# Altium PCB PCB.PcbDoc
Units mm, origin at the board's own origin, x right, y up, seen from the top; angles counter-clockwise.
Board outline 48.64 x 37.97 mm, 2 copper layers (Top Layer, Bottom Layer); 66 components, 33 nets, 189 pads, 161 vias.
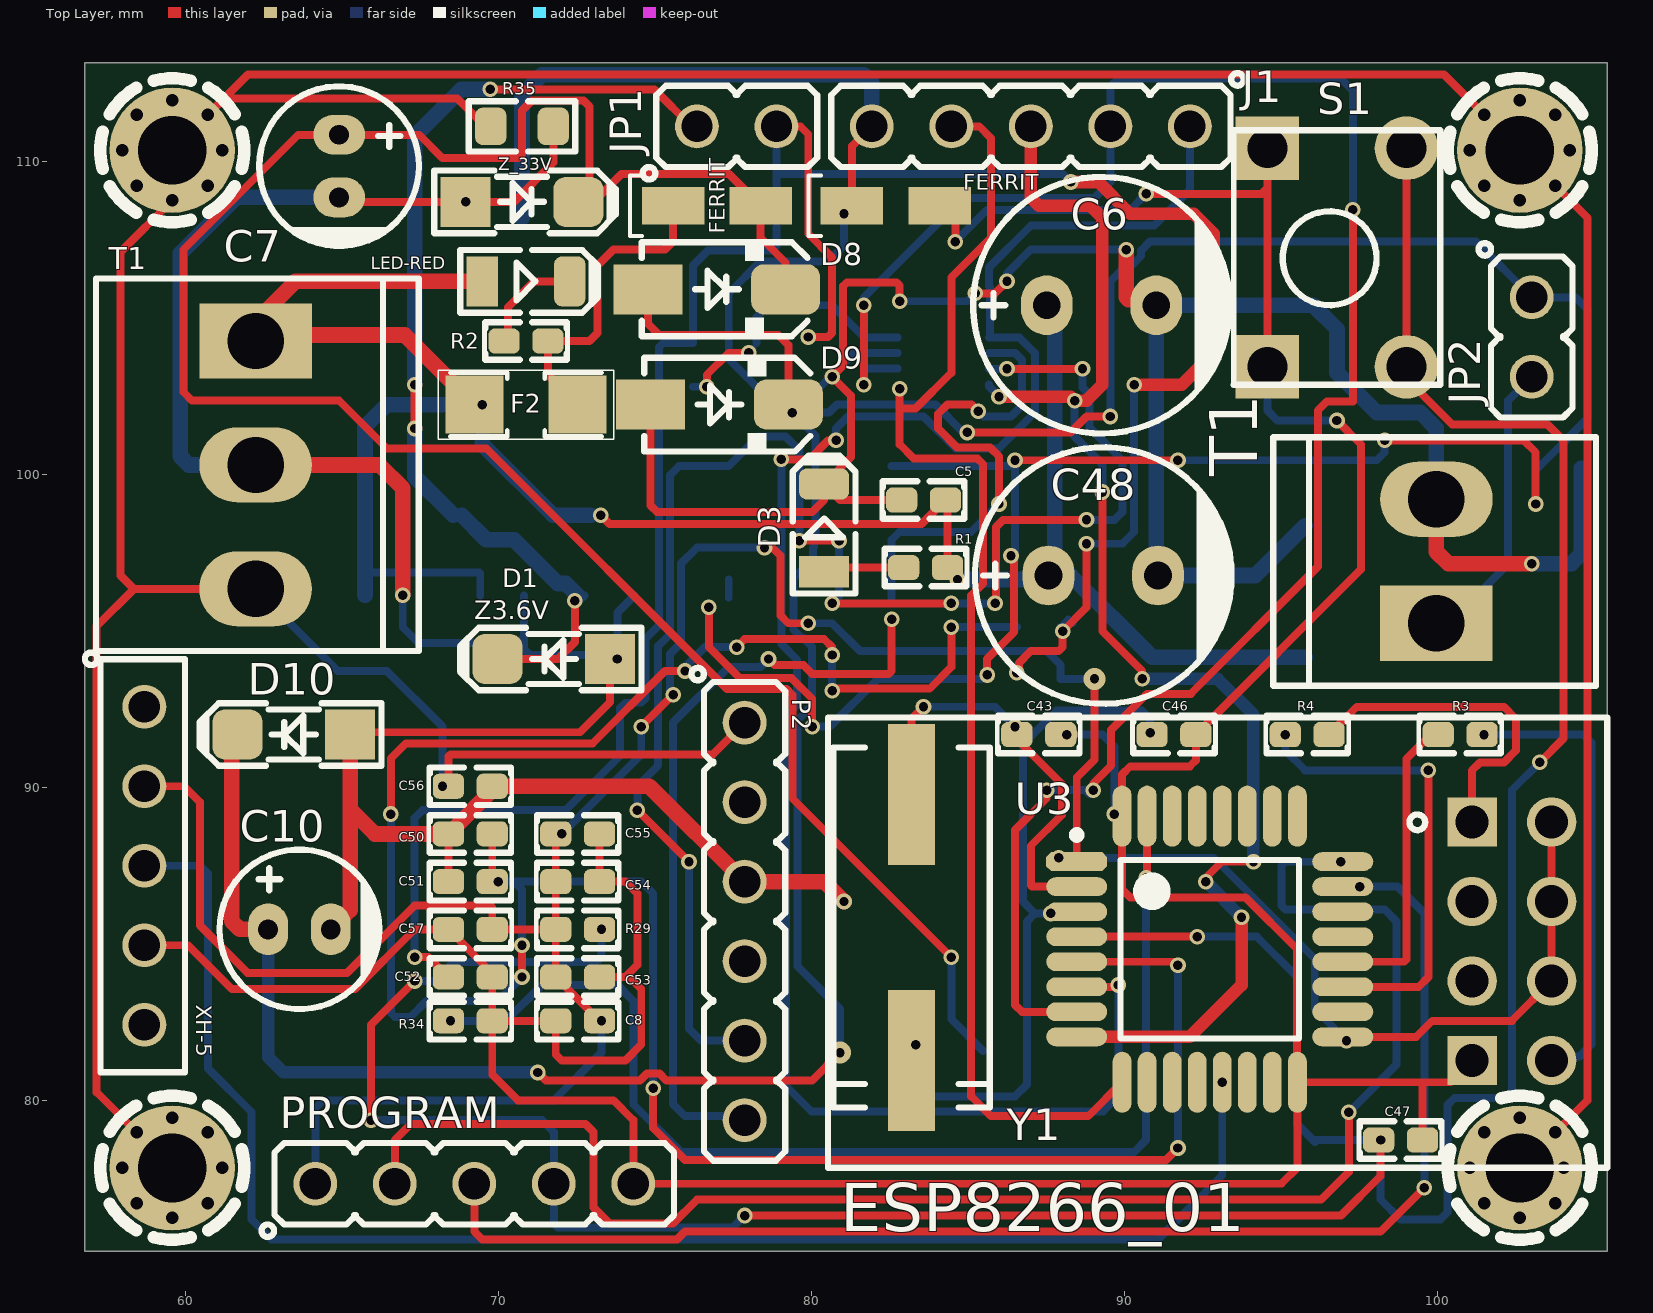
[diagram p0: Top Layer view]
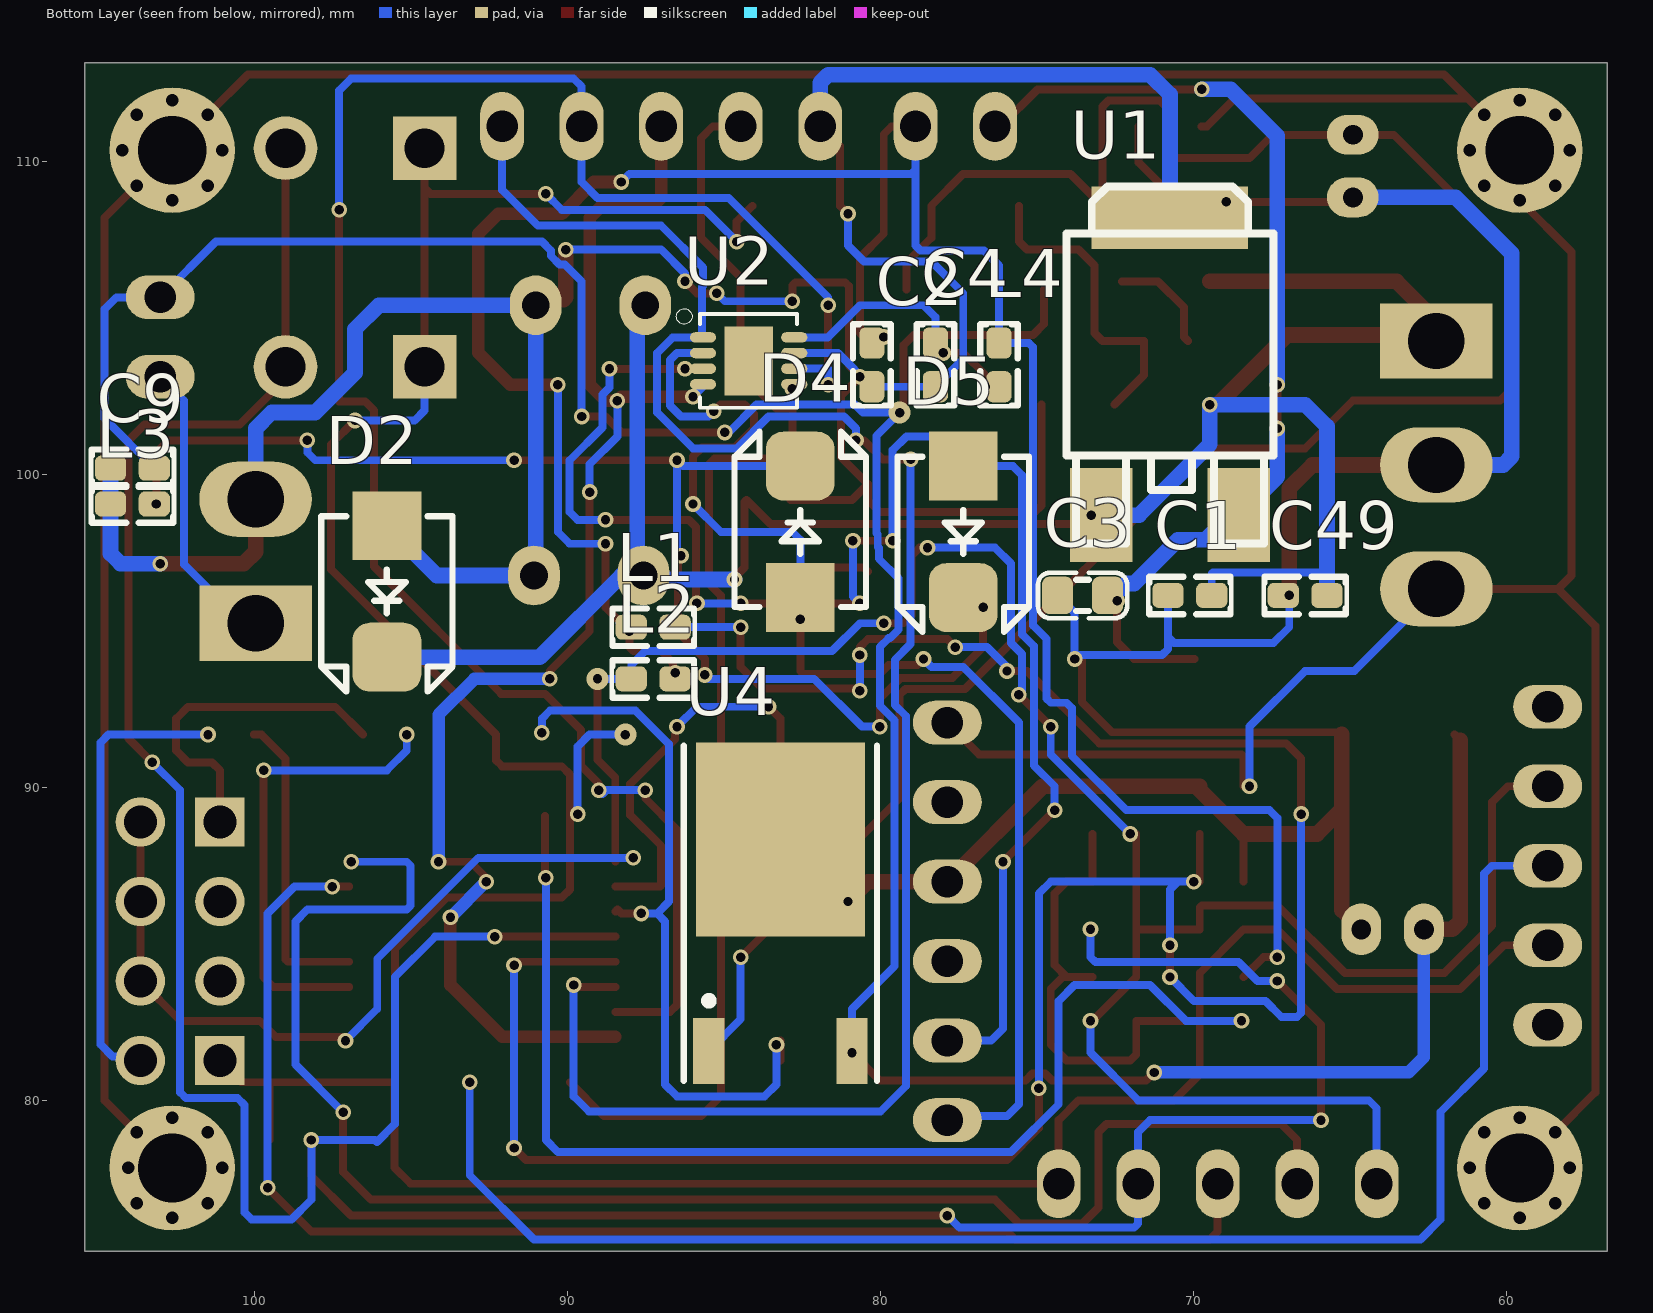
[diagram p1: Bottom Layer view, seen from below]

## Layer stack, top to bottom
Top Solder: solder mask 0.0102, Solder Resist, Dk 3.5
Top Layer: signal copper 0.0356
Dielectric 1: dielectric 0.32, FR-4, Dk 4.8
Bottom Layer: signal copper 0.0356
Bottom Solder: solder mask 0.0102, Solder Resist, Dk 3.5

## Board outline
56.769,75.184 56.769,113.157 105.41,113.157 105.41,75.184

## Design rules (kind name [scope] priority, off if disabled: settings)
Clearance [All] p1: gap=0.1 ignorepadtopadclearanceinfootprint=FALSE
PolygonConnect [All] p1: connectstyle=Relief reliefconductorwidth=0.254 reliefentries=4 polygonreliefangle="90 Angle" airgapwidth=0.254
RoutingVias [All] p1: holewidth=0.3 width=0.5 viastyle="Through Hole" minholewidth=0.1 minwidth=0.3 maxholewidth=4 maxwidth=1.27
SolderMaskExpansion [All] p1: expansion=0.102
Width [All] p1: maxlimit=4 minlimit=0.1 preferedwidth=0.3
30 further rules are at their usual default settings.

## Components (designator, comment, footprint, x,y, rotation, side; value= is the part's Value field where it differs from the comment)
C1 "100nF" C0603 70.104,96.139 r0 bottom
C2 "350nF" C0603 80.264,103.505 r90 bottom
C3 "10uF" C0603E 73.533,96.139 r0 bottom
C4 "350nF" C0603 78.232,103.505 r90 bottom
C5 "350nF" C0603 83.566,99.187 r0 top
C6 "470uF35V" "cap 03" 89.253,105.41 r180 top value=100uF50V
C7 "0.33uF/50V" "cap 01" 64.897,109.855 r90 top value=100uF50V
C8 "100nF" C0603 72.517,82.55 r0 top
C9 "0.1uF" C0603 103.886,100.203 r180 bottom
C10 "1uF/50V" "cap 01" 63.627,85.471 r180 top value=100uF50V
C43 "xpF" C0603 87.249,91.694 r0 top
C46 "xpF" C0603 91.567,91.694 r0 top
C47 "100nF" C0603 98.806,78.74 r0 top
C48 "220uf/35V" "cap 03" 89.309,96.774 r180 top value=100uF-35V
C49 "100nF" C0603 66.421,96.139 r180 bottom
C50 "10nF" L0603 69.088,88.519 r0 top value=100nF
C51 "1uF" C0603 69.088,86.995 r180 top
C52 "10uF" L0603 69.088,83.947 r0 top
C53 "100nF" C0603 72.517,83.947 r180 top
C54 "4.7uF" C0603 72.517,86.995 r180 top value=100nF
C55 "100nF" C0603 72.517,88.519 r180 top
C56 "100nF-400V" C0603 69.088,90.043 r180 top
C57 "4.7uF" C0603 69.088,85.471 r0 top value=100nF
D1 "Z3.6V" D_SOD80 71.755,94.107 r180 top
D2 "SS34" D_SMB 95.758,96.266 r270 bottom
D3 "LED_SMD_RED" LED1206RED 80.391,98.298 r90 top
D4 "SS34" D_SMB 82.55,98.171 r90 bottom
D5 "V3PAL45" D_SMB 77.343,98.171 r270 bottom
D8 "1N4001" D_SMA 76.962,105.918 r0 top
D9 "1N4001" D_SMA 77.048,102.235 r0 top
D10 "Z5.6V" D_SOD80 63.446,91.694 r180 top
ESP8266_01 "STM32F042K6T6" My_32A_M 92.71,84.836 r0 top locked (schematic designator U5)
F2 "Fuse 1" "1206 FUSE" 73.753,101.33 r0 top
FERRIT "Ferrite" "CAPP 1206 (3216X18L) Size A" 75.565,108.585 r0 top (schematic designator F3)
FERRIT "Ferrite" "CAPP 1206 (3216X18L) Size A" 81.28,108.585 r0 top (schematic designator F1)
J1 "out bmd101" HDR_M_1X5 86.995,111.125 r180 top
JP1 "Jumper" HDR_M_1X2 77.597,111.125 r0 top
JP2 "Jumper" HDR_M_1X2 102.997,104.394 r270 top
L1 "10uH" L0603 87.249,95.123 r0 bottom
L2 "10uH" L0603 87.249,93.472 r0 bottom
L3 "10uH" L0603 103.886,99.06 r180 bottom
L4 "10uH" L0603 76.2,103.505 r270 bottom
LED-RED "LED-RED" LED1206RED 70.866,106.172 r0 top (schematic designator D6)
M1 "DNP/MH" SCMH_M2 102.616,110.363 r0 top
M2 "DNP/MH" SCMH_M2 59.563,110.363 r0 top
M3 "DNP/MH" SCMH_M2 59.563,77.851 r0 top
M4 "DNP/MH" SCMH_M2 102.616,77.851 r0 top
P2 "Header 6" HDR_M_1X6 77.851,85.725 r270 top
PROGRAM "program" HDR_M_1X5 69.215,77.343 r0 top (schematic designator P3)
R1 "1K" R0603 83.631,97.028 r0 top
R2 "4.7k" R0603 70.866,104.267 r180 top
R3 "100" R0603 100.711,91.694 r0 top
R4 "100" R0603 95.823,91.694 r0 top
R29 "10k" R0603 72.517,85.471 r0 top value=4.7R
R34 "10k" R0603 69.088,82.55 r0 top value=4.7R
R35 "1M" R0805 70.739,111.125 r180 top
S1 "Tactile Switch 6*6" "Switch - Push to On" 96.774,106.934 r90 top
T1 "PHOENIX" PWL_2 99.949,97.23 r90 top
T1 "Phoenix-RA-3PIN" PWL_3 62.23,100.307 r270 top (schematic designator P1)
U1 "LF33CDT-TR" LF33_2 70.739,103.454 r180 bottom
U2 "BMD101" SON50P305X300X55-9T180X220N 84.201,103.632 r180 bottom
U3 "ESP8266-01" ESP8266-01 170.053,122.174 r180 top locked
U4 "L7805ACD2T" TO-252 83.185,84.963 r180 bottom
XH-5 "XH_5" HDR_F_1X5 58.674,87.503 r270 top (schematic designator J2)
Y1 "x MHz" "Crystal SMD" 83.185,84.963 r90 top
Z_33V "Z33V" D_SOD80 70.739,108.712 r0 top (schematic designator D7)

## Footprints (in the part's own frame and the unit in brackets; to place one, negate y for a bottom-side part, rotate by r counter-clockwise, add the part's x,y. Pads: shape width x height; smd on the part's side, far side on the other; paste and mask are expansions set on the pad)
"1206 FUSE" [mm]
  rect 1.85x1.85 smd: 1(-4.538,0.905) 2(-1.238,0.905)
  silkscreen extent -5.69,-0.2 -0.09,2, body extent -4.49,0.1 -1.29,1.71, height 1
C0603 [mm] "CHIP Capacitor, 1.6X0.8mm, 0603"
  rrect50% 1x0.8 smd mask+0.075: 1(-0.7,0) 2(0.7,0)
  silkscreen extent -1.33,-0.6 1.32,0.6, body extent -0.8,-0.4 0.8,0.4, height 0.9
C0603E [mm] "CHIP Capacitor, 1.6X0.8mm, EXPANDED PAD"
  rrect50% 1x1.2 smd mask+0.05: 1(-0.8,0) 2(0.8,0)
  silkscreen extent -1.43,-0.72 1.43,0.72, body extent -0.8,-0.4 0.8,0.4, height 0.9
"cap 01" [mm]
  oval 1.27x1.651 hole 0.635: 1(1,0) 2(-1,0)
  silkscreen extent -2.55,-2.55 2.55,2.55, body extent -2.53,-2.53 2.53,2.53, height 12.54
"cap 03" [mil]
  oval 65x75 hole 35: 1(68.9,0) 2(-68.9,0)
  silkscreen extent -161,-161 161,161, body extent -159,-159 157,158, height 473
"CAPP 1206 (3216X18L) Size A" [mm] "Chip Capacitor, 2-Leads, Body 3.2x1.6mm, IPC High Density, chip Tantalum"
  rect 1.999x1.199 smd: 1(0,0) 2(2.8,0)
  silkscreen extent -1.38,-0.97 -0.99,0.97, body extent -0.43,-0.9 3.21,0.9, height 1.8
"Crystal SMD" [mm]
  rect 4.5x1.5 smd: 1(-3.683,0) 2(4.817,0)
  silkscreen extent -5.18,-2.5 6.32,2.5, body extent -5.64,-2.25 6.66,2.25, height 5.18
D_SMA [mm] "SMA Molded Diode, 2-Leads, Body 4.3x2.7mm, SOD-128"
  rect 2.2x1.6 smd: 1(-2.2,0)
  rrect50% 2.2x1.6 smd: 2(2.2,0)
  silkscreen extent -2.4,-1.5 2.9,1.5, body extent -2.75,-1.4 2.75,1.4, height 2.6
D_SMB [mm] "SMB Molded Diode, 2-Leads, Body 4.3x3.5mm"
  rect 2.2x2.2 smd: 1(-2.1,0)
  rrect50% 2.2x2.2 smd: 2(2.1,0)
  Top Layer pour cut-out: -1.524,2.1 -1.524,-2.1 1.524,-2.1 1.524,2.1
  silkscreen extent -2.4,-2.1 3.2,2.1, body extent -2.75,-1.95 2.75,1.95, height 2.45
D_SOD80 [mm] "SOD-80 MINI-MELF 3.6X1.6mm, LL-34, LL4148"
  rect 1.6x1.6 smd: 1(-1.8,0)
  rrect50% 1.6x1.6 smd: 2(1.8,0)
  Top Layer pour cut-out: -1.016,1.016 1.016,1.016 1.016,-1.016 -1.016,-1.016
  silkscreen extent -2.8,-1 3,1, body extent -1.85,-0.8 1.85,0.8, height 2
ESP8266-01 [mm]
  rect 1.575x1.575 hole 1.05: 1(68.961,33.274) 4(68.961,40.894)
  round 1.575 hole 1.05: 2(68.961,35.814) 3(68.961,38.354) 5(66.421,40.894) 6(66.421,38.354) 7(66.421,35.814) 8(66.421,33.274)
  silkscreen extent 64.64,29.93 89.53,44.32, body extent 64.59,29.85 89.59,44.35, height 6.3
HDR_F_1X5 [mm] "HEADER FEMALE pitch: 2.54mm"
  round 1.4 / inner round 1.4 / far side oval 1.4x2.2 hole 1 mask+0.1: 1(-5.08,0) 2(-2.54,0) 3(0,0) 4(2.54,0) 5(5.08,0)
  silkscreen extent -6.81,-1.9 6.6,1.3, body extent -6.47,-1.3 6.48,1.2, height 8.5
HDR_M_1X2 [mm] "Connector; Header; 2 Position"
  round 1.4 / inner round 1.4 / far side oval 1.4x2.2 hole 1 mask+0.1: 1(-1.27,0) 2(1.27,0)
  silkscreen extent -3,-1.7 2.57,1.3, body extent -2.54,-1.25 2.44,1.25, height 8.72
HDR_M_1X5 [mm] "Connector; Header; 5 Position"
  round 1.4 / inner round 1.4 / far side oval 1.4x2.2 hole 1 mask+0.1: 1(-5.08,0) 2(-2.54,0) 3(0,0) 4(2.54,0) 5(5.08,0)
  silkscreen extent -6.8,-1.7 6.38,1.3, body extent -6.35,-1.27 6.35,1.27, height 8.54
HDR_M_1X6 [mm] "Connector; Header; 6 Position"
  round 1.4 / inner round 1.4 / far side oval 1.4x2.2 hole 1 mask+0.1: 1(-6.35,0) 2(-3.81,0) 3(-1.27,0) 4(1.27,0) 5(3.81,0) 6(6.35,0)
  silkscreen extent -8.1,-1.7 7.65,1.3, body extent -7.62,-1.3 7.62,1.19, height 8.54
L0603 [mm] "INDUCTOR, FERRITE BEAD, 0603, 1.6X0.8mm"
  rrect50% 1x0.8 smd mask+0.05: 1(-0.7,0) 2(0.7,0)
  silkscreen extent -1.32,-0.6 1.32,0.6, body extent -0.8,-0.4 0.8,0.4, height 0.95
LED1206RED [mm] "LED, 1206, RED"
  rect 1x1.6 smd mask+0.075: 1(-1.4,0)
  rrect50% 1x1.6 smd mask+0.075: 2(1.4,0)
  Top Layer pour cut-out: -1.1,1.1 -1.1,-1.1 1.1,-1.1 1.1,1.1
  silkscreen extent -2.1,-1 2.3,1, body extent -1.6,-0.8 1.6,0.8, height 0.68
LF33_2 [mm]
  rect 2x3 smd: 1(-2.2,-4.75) 3(2.2,-4.75)
  rect 5x2 smd: 2(0,4.75)
  silkscreen extent -3.3,-5.65 3.3,5.75, body extent -3.38,-4.95 3.35,5.15, height 2.37
My_32A_M [mm]
  oct 1.95x0.6 smd: 1(-4.25,2.8)
  oval 1.95x0.6 smd: 2(-4.25,2) 3(-4.25,1.2) 4(-4.25,0.4) 5(-4.25,-0.4) 6(-4.25,-1.2) 7(-4.25,-2) 8(-4.25,-2.8) 17(4.25,-2.8) 18(4.25,-2) 19(4.25,-1.2) 20(4.25,-0.4) 21(4.25,0.4) 22(4.25,1.2) 23(4.25,2) 24(4.25,2.8)
  oval 0.6x1.95 smd: 9(-2.8,-4.25) 10(-2,-4.25) 11(-1.2,-4.25) 12(-0.4,-4.25) 13(0.4,-4.25) 14(1.2,-4.25) 15(2,-4.25) 16(2.8,-4.25) 25(2.8,4.25) 26(2,4.25) 27(1.2,4.25) 28(0.4,4.25) 29(-0.4,4.25) 30(-1.2,4.25) 31(-2,4.25) 32(-2.8,4.25)
  silkscreen extent -4.37,-2.85 2.85,3.77, body extent -3.5,-3.5 3.5,3.5, height 1.2
PWL_2 [mm] "Connector; Header; 2 Position"
  rect 2.4x3.6 hole 1.8: 1(-1.98,0)
  oval 2.4x3.6 hole 1.8: 2(1.98,0)
  silkscreen extent -3.98,-5.1 3.96,5.21, body extent -3.96,-5 3.96,5, height 13.5
PWL_3 [mm] "Terminal Block Green"
  rect 2.4x3.6 hole 1.8: 1(-3.96,0)
  oval 2.4x3.6 hole 1.8: 2(0,0) 3(3.96,0)
  silkscreen extent -5.96,-5.1 5.94,5.21, body extent -5.94,-5 5.94,5, height 13.5
R0603 [mm] "CHIP Resistor 1/10 WATT, 1.6x0.8mm, 0603, 1608"
  rrect50% 1x0.8 smd mask+0.05: 1(-0.7,0) 2(0.7,0)
  silkscreen extent -1.32,-0.6 1.32,0.6, body extent -0.85,-0.4 0.85,0.4, height 0.56
R0805 [mm] "CHIP RESISTOR 1/8 WATT ,2.0X1.3mm, 0805, 2012"
  rrect50% 1x1.2 smd mask+0.05: 1(-1,0) 2(1,0)
  Top Layer pour cut-out: -0.5,0.8 0.5,0.8 0.5,-0.8 -0.5,-0.8
  silkscreen extent -1.7,-0.8 1.7,0.8, body extent -1.15,-0.67 1.15,0.68, height 0.76
SCMH_M2 [mm] "SCREW mouting, M2, 2.0mm diameter and 4.0mm PanHead"
  round 4 / inner round 2.5 / far side round 4 hole 2.2 mask+0.1: 1(0,0)
  Top Layer pour cut-out: 0,2.5 -0.957,2.31 -1.768,1.768 -2.31,0.957 -2.5,0 -2.5,0 -2.31,-0.957 -1.768,-1.768 -0.957,-2.31 0,-2.5 0,-2.5 1.25,-2.165 2.165,-1.25 2.5,0 2.5,0 2.31,0.957 1.768,1.768 0.957,2.31 0,2.5
  Bottom Layer pour cut-out: 0,2.5 -0.957,2.31 -1.768,1.768 -2.31,0.957 -2.5,0 -2.5,0 -2.31,-0.957 -1.768,-1.768 -0.957,-2.31 0,-2.5 0,-2.5 1.25,-2.165 2.165,-1.25 2.5,0 2.5,0 2.31,0.957 1.768,1.768 0.957,2.31 0,2.5
  silkscreen extent -2.3,-2.3 2.3,2.3
SON50P305X300X55-9T180X220N [mm]
  oval 0.835x0.332 smd: 1(-1.458,0.75) 2(-1.458,0.25) 3(-1.458,-0.25) 4(-1.458,-0.75) 5(1.458,-0.75) 6(1.458,-0.25) 7(1.458,0.25) 8(1.458,0.75)
  rect 1.546x2.2 smd: 9(0,0)
  silkscreen extent -2.3,-1.5 1.55,1.67
"Switch - Push to On" [mil]
  rect 80x80 hole 50: 1(-137.5,87.5) 1(137.5,87.5)
  round 80 hole 50: 2(-137.5,-87.5) 2(137.5,-87.5)
  silkscreen extent -160,-130 160,130, body extent -155,-121 157,123, height 205
TO-252 [mm] "D-PAK/TO-252-AA; 3 Leads (1 Cropped); Body 10.1 (inc. leads) x 6.6 mm (LxW max)"
  rect 1x2.1 smd: 1(-2.285,-3.375) 3(2.285,-3.375)
  rect 5.4x6.2 smd: 4(0,3.375)
  silkscreen extent -3.08,-4.32 3.09,6.38, body extent -3.27,-4.11 3.27,5.83, height 2.39

## Part data
C1 C2 C3 C4 C5 C8 C9 C47 C50 C51 C52 C53 C54 C55 C56 C57: library part Cap, "Capacitor", LatestRevisionDate=17-Jul-2002, LatestRevisionNote="Re-released for DXP Platform.", PackageDescription="Radial Cap, Thru-Hole; 2 Leads; 0.3 in Pin Spacing", PackageReference=RAD-0.3, Published=8-Jun-2000, Publisher="Altium Limited"
C6 C7 C10: library part "Cap ELECTROLITIC TOTAL SIZE", "Cap electrolitic radial", Data=16-12-2016, Designer="Abbas Basereh"
C43 C46 C49: library part "CAP SMD PACKAGE", "TOTAL CAPACITOR SMD PACK", Data=2017-3-10, Desc.="CAP SMD TOTAL PACKAGES", Designer="Abbas Basereh"
C48: library part "Cap Pol1", "Polarized Capacitor (Radial)", LatestRevisionDate=17-Jul-2002, LatestRevisionNote="Re-released for DXP Platform.", PackageDescription="Polarized Capacitor (Radial); 2 Leads", PackageReference=RB7.6-15, Published=8-Jun-2000, Publisher="Altium Limited"
D1 D10 Z_33V: library part "D Zener", "Zener Diode", LatestRevisionDate=17-Jul-2002, LatestRevisionNote="Re-released for DXP Platform.", PackageReference=DIODE-0.7, Published=8-Jun-2000, Publisher="Altium Limited"
  D1 D10: PackageDescription="Diode, Thru-Hole; 2 Leads; 0.7 in Pin Spacing"
D2 D4: library part DIODE_SMD_SCHOTTKY_SS34, "DIODE, SCHOTTKY, 20V, 3A", =http://www.chila.ir, ASSEMBLY=ASSEMBLY, DESC=DESCRIPTION, MANF=VISHAY, MANF_P#=SS34, PARAM=20V, PARAM2=3A, Price=PRICE
D3: "LED, SMD, RED"
D5: library part DIODE_SMD_SCHOTTKY_V3PAL45, "DIODE, SCHOTTKY, 45V, 3A", =http://www.chila.ir, ASSEMBLY=ASSEMBLY, DESC=DESCRIPTION, MANF=VISHAY, MANF_P#=V3PAL45HM3_A/I, PARAM="3A, -40~150oC", PARAM2="45Vr, 0.46Vf", Price=0.6$
D8 D9: library part "Diode 1N4148", "High Conductance Fast Diode", Code_JEDEC=DO-204-AH, ComponentLink1Description="Manufacturer Link", ComponentLink1URL=http://www.fairchildsemi.com/, ComponentLink2Description=Datasheet, ComponentLink2URL=http://www.fairchildsemi.com/ds/1N%2F1N4148.pdf, DatasheetVersion=1997, LatestRevisionDate=17-Jul-2002, LatestRevisionNote="Re-released for DXP Platform.", PackageDescription="Diode, Axial; Body 3.8 x 1.9 mm (LxDia. max), Lead Dia. 0.53 mm (max)", PackageReference=DO-35, Published=8-Jun-2000, Publisher="Altium Limited"
ESP8266_01: "ARM® Cortex®-M0 STM32F0 Microcontroller IC 32-Bit Single-Core 48MHz 32KB (32K x 8) FLASH 32-LQFP (7x7)", Package="LQFP-32 STMicroelectronics", Availability="In Stock", Check_prices=https://www.snapeda.com/parts/STM32F042K6T6/STMicroelectronics/view-part/?ref=eda, MF=STMicroelectronics, MP=STM32F042K6T6, Price=None, Purchase-URL=https://pricing.snapeda.com/search/part/STM32F042K6T6/?ref=eda, SnapEDA_Link=https://www.snapeda.com/parts/STM32F042K6T6/STMicroelectronics/view-part/?ref=snap
F2: library part "Fuse 2", "Fuse", LatestRevisionDate=17-Jul-2002, LatestRevisionNote="Re-released for DXP Platform.", PackageReference=PIN-W2/E2.8, Published=8-Jun-2000, Publisher="Altium Limited"
FERRIT FERRIT: library part "Fuse 1", "Fuse", LatestRevisionDate=17-Jul-2002, LatestRevisionNote="Re-released for DXP Platform.", PackageReference=PIN-W2/E2.8, Published=8-Jun-2000, Publisher="Altium Limited"
  FERRIT: PackageDescription="Thru-Hole; 2 Leads"
J1: library part XH_5, "JST-XH pitch: 2.5mm", =http://www.chila.ir, MANF=JST, MANF_P#=JST-B5B-XHA
L1 L2 L3 L4: library part Inductor, "Inductor", Code_IEC=1005, Code_JEITA=0402, LatestRevisionDate=29-May-2009, LatestRevisionNote="IPC-7351 Footprint Added.", PackageDescription="Chip Inductor", PackageReference=0402-A, Published=8-Jun-2000, Publisher="Altium Limited"
LED-RED: library part LED0, "Typical INFRARED GaAs LED", LatestRevisionDate=08-Jul-2005, LatestRevisionNote="Mech Layer 1 removed.", PackageReference=LED-0, Published=8-Jun-2000, Publisher="Altium Limited"
M1 M2 M3 M4: library part SCMH_M3FT, "SCREW mouting, M3, 3.0mm diameter and 6.0mm, FlatHead", =http://www.chila.ir, ASSEMBLY=DNP
P2: "Header, 6-Pin", LatestRevisionDate=17-Jul-2002, LatestRevisionNote="Re-released for DXP Platform.", Publisher="Altium Limited"
PROGRAM: library part "Header 5", "Header, 5-Pin", LatestRevisionDate=17-Jul-2002, LatestRevisionNote="Re-released for DXP Platform.", Publisher="Altium Limited"
R1 R2 R3 R4: library part "RES 0805 0.125W", "RES 0805", Data=16-12-2016, Desc.="RES SMD 0805", Designer="Abbas Basereh"
R29 R34 R35: library part Res1, "Resistor", LatestRevisionDate=17-Jul-2002, LatestRevisionNote="Re-released for DXP Platform.", PackageReference=AXIAL-0.3, Published=8-Jun-2000, Publisher="Altium Limited"
  R29 R34: PackageDescription="Axial Device, Thru-Hole; 2 Leads; 0.3 in Pin Spacing"
S1: library part SW-PB, "Switch", LatestRevisionDate=17-Jul-2002, LatestRevisionNote="Re-released for DXP Platform.", PackageDescription="Switch; 2 Leads", PackageReference=SPST-2, Published=24-Mar-1999, Publisher="Altium Limited"
T1: library part CON_Phoenix_MSTB_02, "2 Pitch: 5.08 mm Color: green Contact surface: Tin Assembly", Manufacturer="PHOENIX CONTACT", Max Current="12 A", Voltage="320 V", Category=Connector, ComponentLink1Description="Header, Nominal current: 12 A Rated voltage (III/2): 320 V Number of positions: 2 Pitch: 5.08 mm Color: green Contact surface: Tin Assembly: Soldering  DESIGNER:ABBAS BASEREH", ComponentLink2Description=Reference, Connector type="PCB Terminal Block", Designer="ABBAS BASEREH", Mounting Technology=Through-Hole, PART.NO=PHOENIX, Pin Count=2, Positions=2, Revision 1=2017-3-1, Status=Unreleased
T1: library part "Header 3", "Phoenix", LatestRevisionDate=17-Jul-2002, LatestRevisionNote="Re-released for DXP Platform.", Publisher="Altium Limited"
U1: "Linear Voltage Regulator IC 1 Output 500mA DPAK", Package="TO-252-3 STMicroelectronics", Availability=Unavailable, MF=STMicroelectronics, MP=LF33CDT-TR, Price=None, SnapEDA_Link=https://www.snapeda.com/parts/LF33CDT-TR/STMicroelectronics/view-part/1049932/?ref=snap
U2: "BMD101 Electrocardiography (ECG/EKG) Sensor mikroBUS™ Click™ Platform Evaluation Expansion Board", Package=None, Availability="Not in stock", Check_prices=https://www.snapeda.com/parts/BMD101/MikroElektronika/view-part/?ref=eda, MF=MikroElektronika, MP=BMD101, Price=None, SnapEDA_Link=https://www.snapeda.com/parts/BMD101/MikroElektronika/view-part/?ref=snap
U3: Package=None, Availability=Unavailable, MF=AI-Thinker, MP=ESP8266-01/ESP-01, Price=None, SnapEDA_Link=https://www.snapeda.com/parts/ESP8266-01/ESP-01/AI-Thinker/view-part/106413/?ref=snap
U4: "Linear Voltage Regulator IC 1 Output 1.5A D2PAK", Package="D2PAK STMicroelectronics", Availability=Unavailable, MF=STMicroelectronics, MP=L7805ACD2T, Price=None, SnapEDA_Link=https://www.snapeda.com/parts/L7805ACD2T/STMicroelectronics/view-part/680973/?ref=snap
XH-5: "JST-XH pitch: 2.5mm", =http://www.chila.ir, MANF=JST, MANF_P#=JST-B5B-XHA
Y1: library part XTAL, "XTAL Crystal", ComponentLink1Description=Datasheet, ComponentLink2Description=Reference, Design Date=2017-1-3, Designer="ABBAS BASEREH", Mounting Technology="Surface Mount\Through-Hole", Status=Unreleased
JP1 JP2: Company=E.P.I.L, Defualt State=Close, Design Date=2011/11/02

## Via types
v1: diameter 0.5, hole 0.3, Top Layer to Bottom Layer, 121 vias
v2: diameter 0.6, hole 0.4, Top Layer to Bottom Layer, 32 vias
v3: diameter 0.7, hole 0.3, Top Layer to Bottom Layer, 8 vias

## Nets (pads, with @x,y where several pads share a name; then routed paths per layer and width w, separated by ;. In a path a pad name is that pad's centre, name@x,y a point inside that pad or via, vN(x,y) a via of type N, cw(c..) or ccw(c..) an arc to the next point about the centre after c; other vN are vias at no path point)
+3.3V: C2.2 C52.1 JP1.2 L1.2 L2.1 L4.1 | length 80.1
  Top Layer w0.254: v1(67.31,84.582) 67.753,84.582 C52.1 ; JP1.2 79.629,111.125 79.883,110.871 79.883,107.696 80.645,106.934 80.645,104.521 80.518,104.394 v1(79.883,104.394) ; v1(86.549,93.664) 86.614,93.729 86.614,93.98 86.995,94.361 87.884,94.361 88.011,94.488 v1(88.011,94.996) 88.773,95.758 v1(88.773,97.79)
  Top Layer w0.4: v1(88.265,109.347) 89.154,109.347 90.17,108.331 92.202,108.331 92.837,107.696 92.837,103.886 91.821,102.87 v1(90.297,102.87)
  Bottom Layer w0.254: v1(67.31,84.582) 67.31,89.027 67.564,89.281 72.136,89.281 73.874,91.019 73.874,92.543 74.041,92.71 74.549,92.71 74.687,92.848 74.687,94.753 75.111,95.177 75.111,97.448 75.115,97.452 75.115,104.071 75.249,104.205 L4.1 76.2,106.68 76.681,107.161 78.713,107.161 78.867,107.315 78.867,109.728 ; JP1.2 78.867,109.728 ; L1.2 88.203,95.377 L1.2@88.33,95.25 ; v1(88.265,109.347) 88.011,109.601 78.994,109.601 78.867,109.728 ; v1(88.773,97.79) 89.916,97.79 90.297,98.171 v1(90.297,102.87)
ADC: ESP8266_01.13 XH-5.3 | length 49.4
  Top Layer w0.254: v1(58.42,87.503) XH-5.3 ; ESP8266_01.13@93.091,80.567 v1(93.11,80.586)
  Bottom Layer w0.254: v1(58.42,87.503) XH-5.3 60.452,87.503 60.706,87.249 60.706,81.026 62.103,79.629 62.103,76.2 62.738,75.565 91.059,75.565 93.11,77.616 v1(93.11,80.586)
AGND: D4.2 D5.2 L3.2 | length 43.3
  Top Layer w0.254: v1(76.708,95.758) 76.708,94.488 77.693,93.503 79.344,93.503 80.01,92.837 v1(80.01,91.948) ; v1(85.598,93.599) 85.598,94.107 86.456,94.965 86.456,97.313 v1(86.36,97.409) ; v1(86.487,100.457) v1(91.694,100.457) ; v1(98.298,101.092) 102.743,101.092 103.124,100.711 v1(103.124,99.06)
  Bottom Layer w0.254: D5.2 D5.2@77.343,96.647 ; v1(80.01,91.948) 80.581,91.948 82.105,93.472 85.471,93.472 v1(85.598,93.599) ; D4.2 86.301,100.271 v1(86.487,100.457) 86.487,97.536 v1(86.36,97.409) ; v1(91.694,100.457) 98.044,100.457 98.298,100.711 v1(98.298,101.092) ; v1(103.124,99.06) L3.2
AVDD_MIC: C50.2 C51.1 ESP8266_01.5 L1.1 | length 81.6
  Top Layer w0.254: v1(66.548,89.154) 66.548,90.932 67.029,91.413 72.998,91.413 75.311,93.726 v1(75.946,93.726) ; C50.2 C51.1 v1(69.977,86.995) ; v1(70.739,83.947) v1(70.739,84.963) ; v1(74.93,80.391) 74.93,79.121 75.946,78.105 91.313,78.105 v1(91.694,78.486) ; v1(77.597,94.488) 77.851,94.742 80.391,94.742 80.645,94.488 v1(80.645,94.234) ; v1(80.645,93.091) 80.714,93.16 83.762,93.16 84.455,93.853 v1(84.455,95.123) ; ESP8266_01.5 91.586,84.436 v1(91.694,84.328)
  Bottom Layer w0.254: v1(66.548,89.154) 66.548,82.804 66.675,82.677 67.183,82.677 67.691,83.185 69.977,83.185 v1(70.739,83.947) ; v1(69.977,86.995) 70.485,86.995 ; v1(70.739,84.963) 70.739,86.741 70.485,86.995 ; v1(74.93,80.391) 74.93,86.614 74.549,86.995 70.485,86.995 ; v1(75.946,93.726) 75.946,93.853 76.581,94.488 v1(77.597,94.488) ; v1(80.645,93.091) v1(80.645,94.234) ; v1(84.455,95.123) L1.1 ; v1(91.694,78.486) v1(91.694,84.328)
BMD-reset: ESP8266_01.7 J1.2 U2.6 | length 62.9
  Top Layer w0.254: v1(81.661,102.87) v1(81.661,105.41) ; v1(87.503,89.916) 87.503,89.662 86.487,88.646 86.487,83.058 86.709,82.836 ESP8266_01.7 ; v1(88.989,89.916) 88.989,90.132 89.556,90.699 89.556,91.842 90.709,92.995 92.106,92.995 96.17,97.059 96.17,102.052 96.449,102.331 97.282,102.331 v1(97.282,108.458)
  Bottom Layer w0.254: v1(81.661,102.87) 81.661,103.378 81.665,103.382 U2.6 ; v1(81.661,105.41) 81.661,105.664 84.836,108.839 89.027,108.839 89.535,109.347 J1.2 89.535,112.395 89.789,112.649 96.901,112.649 97.282,112.268 v1(97.282,108.458) ; v1(87.503,89.916) 88.735,89.916 88.862,89.789 v1(88.989,89.916)
BMD_CS: ESP8266_01.6 J1.1 U2.1 | length 61.7
  Top Layer w0.254: v1(79.025,100.488) 79.914,100.488 80.518,101.092 v1(80.772,101.092) ; ESP8266_01.6 89.732,83.636 v1(89.789,83.693)
  Bottom Layer w0.254: v1@78.929,100.584 v1(79.025,100.488) 79.025,94.584 79.529,94.08 79.529,92.642 79.179,92.292 79.179,80.46 79.983,79.656 89.308,79.656 89.789,80.137 v1(89.789,83.693) ; v1(80.772,101.092) 80.772,101.473 81.153,101.854 83.566,101.854 84.582,100.838 85.979,100.838 87.122,101.981 87.122,103.886 86.626,104.382 U2.1 85.694,104.418 85.694,105.989 85.659,106.024 85.659,106.614 86.995,107.95 90.932,107.95 92.075,109.093 J1.1
BOOT0: ESP8266_01.31 R34.1 | length 37.4
  Top Layer w0.254: v1(90.678,87.122) 90.71,87.154 ESP8266_01.31
  Bottom Layer w0.254: v1(68.453,82.55) 70.231,82.55 71.374,83.693 73.787,83.693 74.295,83.185 74.295,79.883 75.819,78.359 90.297,78.359 90.678,78.74 v1(90.678,87.122)
DGND: C8.1 C43.2 C46.2 C47.2 C52.2 C53.1 C54.1 C55.1 C57.1 ESP8266_01.16 ESP8266_01.32 FERRIT.2@84.08,108.585 PROGRAM.5 R34.2 S1.1 U3.4 XH-5.4 | length 127.2
  Top Layer w0.254: XH-5.4 60.071,84.963 61.468,83.566 65.405,83.566 67.31,85.471 C57.1 69.788,84.071 C52.2 R34.2 ; C53.1 74.041,83.947 ; C55.1 C54.1 74.041,86.995 74.422,86.614 74.422,84.328 74.041,83.947 ; FERRIT.2@84.08,108.585 84.582,108.083 v1(84.582,107.442) ; v1(90.678,108.966) 94.361,108.966 94.551,109.156 ; S1.1@94.551,103.441 94.551,109.156 ; S1.1@94.551,110.426 94.551,109.156 ; v1(96.774,101.727) 97.536,100.965 97.536,96.963 C46.2 92.267,90.87 92.075,90.678 90.17,90.678 89.91,90.418 ESP8266_01.32 89.91,86.747 90.17,86.487 93.853,86.487 95.504,84.836 95.504,80.592 ESP8266_01.16 ; C47.2 99.506,80.583 99.509,80.586 ; U3.4 100.398,80.586 99.509,80.586 ; R34.2 69.788,80.834 70.612,80.01 73.66,80.01 74.295,79.375 PROGRAM.5 94.996,77.343 95.51,77.857 ESP8266_01.16 ; R34.2 C8.1 71.817,81.472 72.009,81.28 74.041,81.28 74.549,81.788 74.549,83.566 74.168,83.947 74.041,83.947 ; ESP8266_01.16 99.509,80.586
  Bottom Layer w0.254: v1(84.582,107.442) 85.598,108.458 90.17,108.458 v1(90.678,108.966) ; v3(88.138,91.694) 89.281,91.694 89.662,91.313 v1(89.662,89.154) ; S1.1@94.551,103.441 94.551,102.044 94.869,101.727 v1(96.774,101.727)
Earth: C56.2 M1.1 M2.1 M3.1 M4.1 P2.1 R35.2 T1.3 | length 146
  Top Layer w0.254: v2(58.432,78.982) 57.15,80.264 57.15,95.158 58.339,96.347 ; T1.3 58.339,96.347 ; C56.2 68.388,90.994 68.453,91.059 76.835,91.059 P2.1 ; R35.2 69.556,111.125 68.667,112.014 61.214,112.014 ; M4.1 v2(103.747,78.982) 104.775,80.01 104.775,108.204 v2(103.747,109.232) M1.1 v2(101.485,111.494) 100.196,112.783 61.983,112.783 61.214,112.014 ; 58.339,96.347 57.912,96.774 57.912,107.112 v2(59.563,108.763) M2.1 v2(60.694,111.494) 61.214,112.014
  Bottom Layer w0.254: T1.3 64.851,93.726 66.421,93.726 68.199,91.948 v1(68.199,90.043)
  other v2: 59.563,76.251 102.616,76.251 58.432,76.72 60.694,76.72 101.485,76.72 103.747,76.72 57.963,77.851 61.163,77.851 101.016,77.851 104.013,77.851 60.694,78.982 101.485,78.982 59.563,79.451 102.616,79.451 102.616,108.763 58.432,109.232 60.694,109.232 101.485,109.232 57.963,110.363 61.163,110.363 101.016,110.363 104.216,110.363 58.432,111.494 103.747,111.494 59.563,111.963 102.616,111.963
GND: C1.2 C2.1 C3.2 C4.1 C5.1 C6.2 C7.2 C9.1 C10.2 C48.2 C49.1 C50.1 C51.2 C56.1 D1.1 D2.1 D3.2 D9.1 D10.1 FERRIT.1@81.28,108.585 J1.5 L3.1 P2.3 R35.1 T1.2 U1.2 U2.7 U4.4 Z_33V.1 | length 184.1
  Top Layer w0.254: C7.2 65.04,108.712 v1(68.939,108.712) 70.485,108.712 71.739,109.966 R35.1 ; D10.1 65.319,91.767 72.59,91.767 73.555,92.732 D1.1 ; C51.2 C50.1 ; C56.1@69.788,89.919 C56.1 ; D9.1 74.848,99.015 75.057,98.806 80.01,98.806 80.391,99.187 D3.2 ; v1(81.026,108.331) 81.28,108.585 81.28,110.49 J1.5 ; v1(82.804,105.537) 82.804,106.045 82.708,106.141 81.122,106.141 80.999,106.018 80.999,103.478 v1(80.645,103.124) 81.249,102.52 81.249,100.556 D3.2 ; C5.1 80.902,99.187 D3.2 ; v1(85.217,105.791) 85.852,105.791 v1(86.233,106.172) ; 90.114,105.593 v1(91.003,105.593) ; v1(99.822,99.695) 99.822,99.337 T1.2@99.949,99.21
  Top Layer w0.5: T1.2@62.23,100.307 66.19,100.307 66.929,99.568 v1(66.929,96.139) ; C10.2 65.246,86.09 65.246,89.313 ; D10.1 65.246,89.313 ; C56.1@69.788,89.919 C50.1 66.04,88.519 65.246,89.313 ; C56.1 74.803,90.043 P2.3 ; v1(78.105,86.995) 80.391,86.995 v1(81.026,86.36) ; v1(90.043,107.188) 90.043,105.664 90.114,105.593 ; T1.2@99.949,99.21 99.949,97.536 100.33,97.155 v1(102.997,97.155)
  Bottom Layer w0.254: v1(66.929,96.139) 66.929,95.123 67.437,94.615 70.612,94.615 70.804,94.807 ; C1.2 70.804,94.807 ; C3.2 73.787,95.593 v1(73.787,94.107) 73.66,94.234 70.993,94.234 70.804,94.423 70.804,94.807 ; P2.3 v1(78.105,86.995) ; v1(81.026,108.331) 81.026,107.315 80.518,106.807 78.359,106.807 77.343,105.791 77.343,103.694 C4.1 C2.1 81.341,103.882 U2.7 ; v1(82.804,105.537) 84.963,105.537 v1(85.217,105.791) ; v1(86.233,106.172) 86.233,106.426 86.995,107.188 v1(90.043,107.188) ; C48.2@91.003,96.83 C48.2
  Bottom Layer w0.5: T1.2@62.23,100.307 60.094,100.307 59.817,100.584 59.817,107.061 61.611,108.855 C7.2 ; U1.2 70.739,112.141 71.374,112.776 81.661,112.776 81.915,112.522 J1.5 ; C48.2@91.003,96.83 C6.2 96.012,105.41 96.774,104.648 96.774,103.251 98.044,101.981 99.441,101.981 99.949,101.473 T1.2@99.949,99.21 ; C48.2 94.166,96.774 D2.1 ; v1(102.997,97.155) 104.267,97.155 104.586,97.474 L3.1 C9.1
N\R\S\T\: C47.1 ESP8266_01.4 PROGRAM.4 R29.2 S1.2 | length 109.4
  Top Layer w0.254: v1(65.913,79.375) 65.913,82.423 v1(67.31,83.82) ; v1(77.851,76.327) 96.901,76.327 98.171,77.597 v1(98.171,78.74) ; ESP8266_01.4 v1(92.31,85.236) ; v1(98.933,103.124) 100.457,101.6 103.505,101.6 104.013,101.092 104.013,91.567 v1(103.251,90.805) ; S1.2@98.996,103.441 S1.2@98.996,110.426
  Bottom Layer w0.254: v1(65.913,79.375) 71.374,79.375 71.755,78.994 PROGRAM.4 71.755,76.073 71.882,75.946 77.47,75.946 v1(77.851,76.327) ; v1(67.31,83.82) 67.945,83.82 68.549,84.424 73.121,84.424 73.279,84.582 v1(73.279,85.471) ; v1(92.31,85.236) 94.215,85.236 95.504,83.947 95.504,79.248 96.074,78.678 96.136,78.74 v1(98.171,78.74) 98.171,76.835 98.806,76.2 100.076,76.2 100.306,76.43 100.306,79.859 100.525,80.078 102.176,80.078 102.362,80.264 102.362,89.916 v1(103.251,90.805) ; v1(98.933,103.124) 98.996,103.188 S1.2@98.996,103.441
NetC3_1: C3.1 D1.2 JP1.1 U1.3 | length 32.2
  Top Layer w0.254: v1(67.31,101.473) v1(67.31,102.87) ; v1(69.723,112.306) 74.968,112.306 76.149,111.125 JP1.1 ; D1.2 71.882,94.107 72.428,94.653 v1(72.428,95.974)
  Bottom Layer w0.254: U1.3 U1.3@68.809,98.704 ; v1(72.428,95.974) 72.568,95.974 C3.1
  Bottom Layer w0.5: v1(67.31,101.473) 67.31,99.933 U1.3 ; v1(67.31,102.87) 67.31,110.82 68.796,112.306 v1(69.723,112.306) ; U1.3@68.809,98.704 69.596,97.917 70.485,97.917 71.882,96.52 72.136,96.52 C3.1@72.517,96.139
NetC7_1: C7.1 D8.2 FERRIT.2@78.365,108.585 U4.1 Z_33V.2 | length 71.2
  Top Layer w0.254: D8.2 79.162,106.766 78.365,107.563 78.365,108.585 77.349,109.601 73.914,109.601 73.025,108.712 Z_33V.2 72.898,109.071 72.898,111.76 72.706,111.952 71.058,111.952 70.739,111.633 70.739,110.236 70.612,110.109 68.199,110.109 67.453,110.855 C7.1 63.59,110.855 59.917,107.182 59.917,102.643 60.198,102.362 64.897,102.362 66.421,100.838 69.596,100.838 77.285,93.149 79.19,93.149 79.375,92.964 79.375,89.662 v1(84.455,84.582)
  Bottom Layer w0.254: v1(84.455,84.582) 84.455,82.603 U4.1
NetC9_2: C9.2 C10.1 D8.1 D9.2 D10.2 JP2.1 U4.3 | length 98
  Top Layer w0.254: D10.2@61.468,91.516 D10.2 ; v1(71.247,80.899) 71.501,80.645 74.509,80.645 74.732,80.868 75.128,80.868 75.351,80.645 80.01,80.645 v3(80.899,81.534) ; D8.1 74.762,104.816 75.115,104.463 78.925,104.463 79.248,104.14 D9.2 ; v1(84.963,101.346) 88.265,101.346 88.773,101.854 v1(89.535,101.854)
  Top Layer w0.5: D10.2@61.468,91.516 61.468,85.725 61.722,85.471 v3(62.627,85.471)
  Bottom Layer w0.254: U4.3 80.9,82.93 79.533,84.297 79.533,92.146 80.01,92.623 80.01,94.488 79.725,94.773 79.685,94.773 79.406,95.052 79.406,96.678 80.041,97.313 80.041,97.654 80.075,97.688 80.075,98.084 80.117,98.126 80.117,101.239 v3(79.375,101.981) 80.544,101.981 80.798,102.235 83.947,102.235 84.836,101.346 v1(84.963,101.346) ; v1(89.535,101.854) 89.535,106.172 90.074,106.711 90.241,106.711 90.52,106.99 90.52,107.157 90.805,107.442 101.219,107.442 JP2.1 104.394,105.664 104.775,105.283 104.775,101.792 C9.2
  Bottom Layer w0.4: v3(62.627,85.471) 62.627,81.391 63.119,80.899 v1(71.247,80.899)
NetC43_1: C43.1 ESP8266_01.2 Y1.2 | length 13.5
  Top Layer w0.254: Y1.2 83.185,92.202 v1(83.566,92.583) ; C43.1 86.549,91.545 87.983,90.111 87.983,89.126 86.995,88.138 86.995,86.868 87.027,86.836 ESP8266_01.2
  Bottom Layer w0.254: v1(83.566,92.583) 85.852,92.583 v1(86.487,91.948)
NetC46_1: C46.1 ESP8266_01.3 Y1.1 | length 23.6
  Top Layer w0.254: Y1.1 83.185,81.915 v1(83.312,81.788) ; v1(87.63,85.979) 88.263,85.979 88.39,86.106 ESP8266_01.3
  Bottom Layer w0.254: v1(83.312,81.788) 83.312,80.518 83.693,80.137 86.487,80.137 86.868,80.518 86.868,85.725 87.122,85.979 ; v1(87.63,85.979) 87.122,85.979 ; v1(90.805,91.756) 90.805,92.202 90.551,92.456 87.811,92.456 86.741,91.386 86.741,86.36 87.122,85.979
NetD3_1: D3.1 R1.1 | length 2.6
  Top Layer w0.254: D3.1 80.521,97.028 R1.1
NetD4_1: D4.1 P2.6 U2.2 | length 40.2
  Top Layer w0.254: P2.6 v3(77.851,79.502) ; v1(78.613,94.107) 78.811,93.909 79.731,93.909 80.01,93.63 82.454,93.63 82.55,93.726 v1(82.55,95.377) ; v1(85.31,102.027) 85.102,102.235 84.328,102.235 84.034,101.941 84.034,101.473 84.638,100.869 85.694,100.869 85.979,100.584 v1(85.979,99.06)
  Bottom Layer w0.254: v3(77.851,79.502) 75.946,79.502 75.565,79.883 75.565,92.075 77.343,93.853 78.359,93.853 v1(78.613,94.107) ; D4.1 82.55,97.917 82.804,98.171 85.09,98.171 v1(85.979,99.06) ; v1(85.31,102.027) 85.483,101.854 86.36,101.854 86.71,102.204 86.71,103.663 86.491,103.882 U2.2
NetD5_1: D5.1 P2.5 U2.3 | length 51.8
  Top Layer w0.254: v1(74.422,89.281) v1(76.073,87.63) ; v1(79.598,97.886) v1(80.868,97.886) ; v1(80.645,95.885) v1(84.455,95.885) ; v1(85.852,95.885) 85.883,95.916 85.883,98.329 86.106,98.552 v1(88.773,98.552) ; v1(86.233,103.378) v1(88.646,103.378)
  Bottom Layer w0.254: v1(74.422,89.281) 74.422,90.043 75.088,90.709 75.088,94.519 75.465,94.896 75.465,97.302 75.469,97.306 75.469,99.98 75.76,100.271 D5.1 78.291,101.219 79.161,101.219 79.598,100.782 v1(79.598,97.886) ; v1(76.073,87.63) 76.073,82.296 76.454,81.915 P2.5 ; v1(80.645,95.885) 80.868,96.108 v1(80.868,97.886) ; v1(84.455,95.885) v1(85.852,95.885) ; U2.3 85.663,103.378 v1(86.233,103.378) ; v1(88.646,103.378) 88.646,102.783 88.869,102.56 88.869,101.504 89.916,100.457 89.916,98.806 89.662,98.552 v1(88.773,98.552)
NetD6_2: LED-RED.2 R2.2 | length 3.4
  Top Layer w0.254: R2.2 70.293,104.394 70.293,105.345 71.12,106.172 LED-RED.2
NetF2_2: F2.2 FERRIT.1@75.565,108.585 R2.1 | length 10.1
  Top Layer w0.254: F2.2 71.566,103.184 R2.1 72.898,104.267 73.152,104.521 73.152,106.68 73.66,107.188 75.311,107.188 75.565,107.442 FERRIT.1@75.565,108.585
NetJP2_2: JP2.2 T1.1@99.949,95.25 | length 9
  Bottom Layer w0.254: T1.1@100.33,95.227 102.235,97.132 102.235,102.362 JP2.2
NetR3_1: ESP8266_01.20 R3.1 | length 9.8
  Top Layer w0.254: ESP8266_01.20 98.914,84.436 98.991,84.513 98.991,90.917 99.768,91.694 R3.1
NetR4_1: ESP8266_01.19 R4.1 | length 14.8
  Top Layer w0.254: ESP8266_01.19 99.384,83.636 99.695,83.947 v1(99.695,90.551)
  Bottom Layer w0.254: v1(95.123,91.694) 95.123,91.186 95.758,90.551 v1(99.695,90.551)
RX: ESP8266_01.8 J1.3 U2.4 | length 44.4
  Top Layer w0.254: v1(89.281,99.441) 89.281,94.996 90.551,93.726 v1(90.551,93.472) ; v1(92.583,86.995) 92.583,87.122 93.091,87.63 v1(94.107,87.63)
  Top Layer w0.4: v1(85.979,102.489) 88.265,102.489 v1(88.392,102.362) 88.773,102.362 89.281,102.87 89.281,108.204 88.9,108.585 87.249,108.585 86.995,108.839 J1.3 ; ESP8266_01.8 92.069,82.036 93.726,83.693 v1(93.726,85.852)
  Bottom Layer w0.254: U2.4 85.659,102.809 v1(85.979,102.489) ; v1(88.392,102.362) 88.392,101.219 89.281,100.33 v1(89.281,99.441)
  Bottom Layer w0.4: v1(90.551,93.472) 92.964,93.472 94.107,92.329 v1(94.107,87.63) ; v1(92.583,86.995) v1(93.726,85.852)
RXD: R3.2 U3.5 | length 14.7
  Top Layer w0.254: U3.5 103.632,81.407 v3(103.759,81.407)
  Bottom Layer w0.254: v1(101.473,91.694) 104.648,91.694 104.902,91.44 104.902,81.788 104.521,81.407 v3(103.759,81.407)
SWCLK: ESP8266_01.24 PROGRAM.2 | length 51.3
  Top Layer w0.254: PROGRAM.2 66.675,78.74 67.183,79.248 72.771,79.248 73.025,78.994 73.025,76.581 73.533,76.073 75.565,76.073 76.327,76.835 96.266,76.835 97.155,77.724 v1(97.155,79.629)
  Bottom Layer w0.254: v1(96.901,87.63) 95.123,87.63 94.996,87.503 94.996,86.233 95.123,86.106 98.298,86.106 98.679,85.725 98.679,81.153 v1(97.155,79.629)
SWDIO: ESP8266_01.23 PROGRAM.3 | length 44.4
  Top Layer w0.254: PROGRAM.3 69.215,75.819 69.469,75.565 75.692,75.565 75.946,75.819 98.171,75.819 v1(99.568,77.216) ; ESP8266_01.23 v1(97.504,86.836)
  Bottom Layer w0.254: v1(97.504,86.836) 98.711,86.836 99.568,85.979 v1(99.568,77.216)
TX: ESP8266_01.9 J1.4 U2.5 | length 42.2
  Top Layer w0.254: v1(82.804,102.743) 82.804,102.108 ; J1.4 85.344,111.125 85.725,110.744 85.725,107.569 84.455,106.299 84.455,103.251 83.312,102.108 82.804,102.108 ; ESP8266_01.9 88.826,79.502 85.725,79.502 85.09,80.137 85.09,96.139 85.471,96.52 85.471,100.33 85.286,100.515 83.254,100.515 82.804,100.965 82.804,102.108
TXD: R4.2 U3.1 | length 10.8
  Top Layer w0.254: R4.2 97.409,92.58 102.111,92.58 102.489,92.202 102.489,91.186 102.108,90.805 101.346,90.805 101.092,90.551 U3.1
V+6.5: C1.1 C5.2 C6.1 C48.1 C49.2 D2.2 F2.1 LED-RED.1 R1.2 T1.1@62.23,104.267 U1.1 | length 71.8
  Top Layer w0.254: v1(73.254,98.704) 73.533,98.425 83.504,98.425 C5.2 84.331,99.122 R1.2 84.65,96.709 v1(84.65,96.647)
  Top Layer w0.5: F2.1 66.992,104.457 61.785,104.457 63.5,106.172 LED-RED.1
  Bottom Layer w0.254: 65.721,96.836 65.762,96.877 69.366,96.877 69.404,96.839 C1.1 ; U1.1 v1(73.254,98.704) ; C48.1@87.435,96.65 C48.1 ; C48.1@87.757,96.972 C48.1 ; C48.1@88.265,96.774 C48.1
  Bottom Layer w0.5: C49.2 65.721,96.836 65.721,101.535 66.421,102.235 v1(69.469,102.235) 69.469,100.965 71.73,98.704 U1.1 ; v1(84.65,96.647) 87.432,96.647 C48.1@87.435,96.65 ; C6.1 87.757,105.156 C48.1@87.757,96.972 ; C48.1@88.265,96.774 90.873,94.166 D2.2
VCC-IC: C4.2 L4.2 U2.8 | length 8.5
  Top Layer w0.254: v1(76.643,102.805) 76.643,103.186 77.343,103.886 v1(77.978,103.886)
  Bottom Layer w0.254: L4.2 v1(76.643,102.805) ; v1(77.978,103.886) C4.2@78.105,104.013 ; C4.2 78.232,105.029 78.613,105.41 80.645,105.41 81.673,104.382 U2.8
VDD_MIC: C8.2 C53.2 C54.2 C55.2 C57.2 ESP8266_01.1 ESP8266_01.17 L2.2 PROGRAM.1 R29.1 U3.6 U3.7 U3.8 XH-5.2 | length 97.7
  Top Layer w0.254: XH-5.2 59.944,90.043 60.452,89.535 60.452,85.598 61.976,84.074 65.151,84.074 67.31,86.233 69.723,86.233 69.788,86.168 C57.2 R29.1 ; PROGRAM.1 v3(64.135,77.47) ; v1(72.009,88.519) C55.2 C54.2 R29.1 ; C8.2 71.82,83.947 C53.2 R29.1 ; v1(74.549,91.948) v1(75.565,92.964) ; v1(78.486,97.663) 78.74,97.663 78.994,97.409 78.994,95.504 79.248,95.25 v1(79.883,95.25) ; ESP8266_01.1 88.461,87.637 88.461,90.324 89.027,90.89 v3(89.027,93.472) ; v1(97.081,81.915) ESP8266_01.17 99.308,82.036 99.822,82.55 102.362,82.55 U3.6 U3.7 U3.8
  Bottom Layer w0.254: v3(64.135,77.47) 64.135,79.756 64.389,80.01 71.755,80.01 73.279,81.534 v1(73.279,82.55) ; v1(72.009,88.519) 74.549,91.059 v1(74.549,91.948) ; v1(75.565,92.964) 75.469,93.06 75.469,94.265 75.819,94.615 75.819,97.155 76.327,97.663 v1(78.486,97.663) ; v1(79.883,95.25) 80.645,95.25 81.534,94.361 87.503,94.361 87.949,93.915 L2.2 v3(89.027,93.472) ; v1(87.884,87.757) 92.837,87.757 96.065,84.529 96.065,82.931 v1(97.081,81.915)
pads on no net: ESP8266_01.10 ESP8266_01.11 ESP8266_01.12 ESP8266_01.14 ESP8266_01.15 ESP8266_01.18 ESP8266_01.21 ESP8266_01.22 ESP8266_01.25 ESP8266_01.26 ESP8266_01.27 ESP8266_01.28 ESP8266_01.29 ESP8266_01.30 P2.2 P2.4 U2.9 U3.2 U3.3 XH-5.1 XH-5.5

## Silkscreen, mask and mechanical layers (free items; w line width, h text height)
Top Overlay:
  text "Z3.6V" at 69.215,95.377 h0.6
Mechanical 1:
  the board outline again, w0.254